# Altium PCB pcb.PcbDoc
Units mm, origin at the board's own origin, x right, y up, seen from the top; angles counter-clockwise.
Board outline 53 x 48 mm, 2 copper layers (Top Layer, Bottom Layer); 15 components, 9 nets, 49 pads, 1 vias.
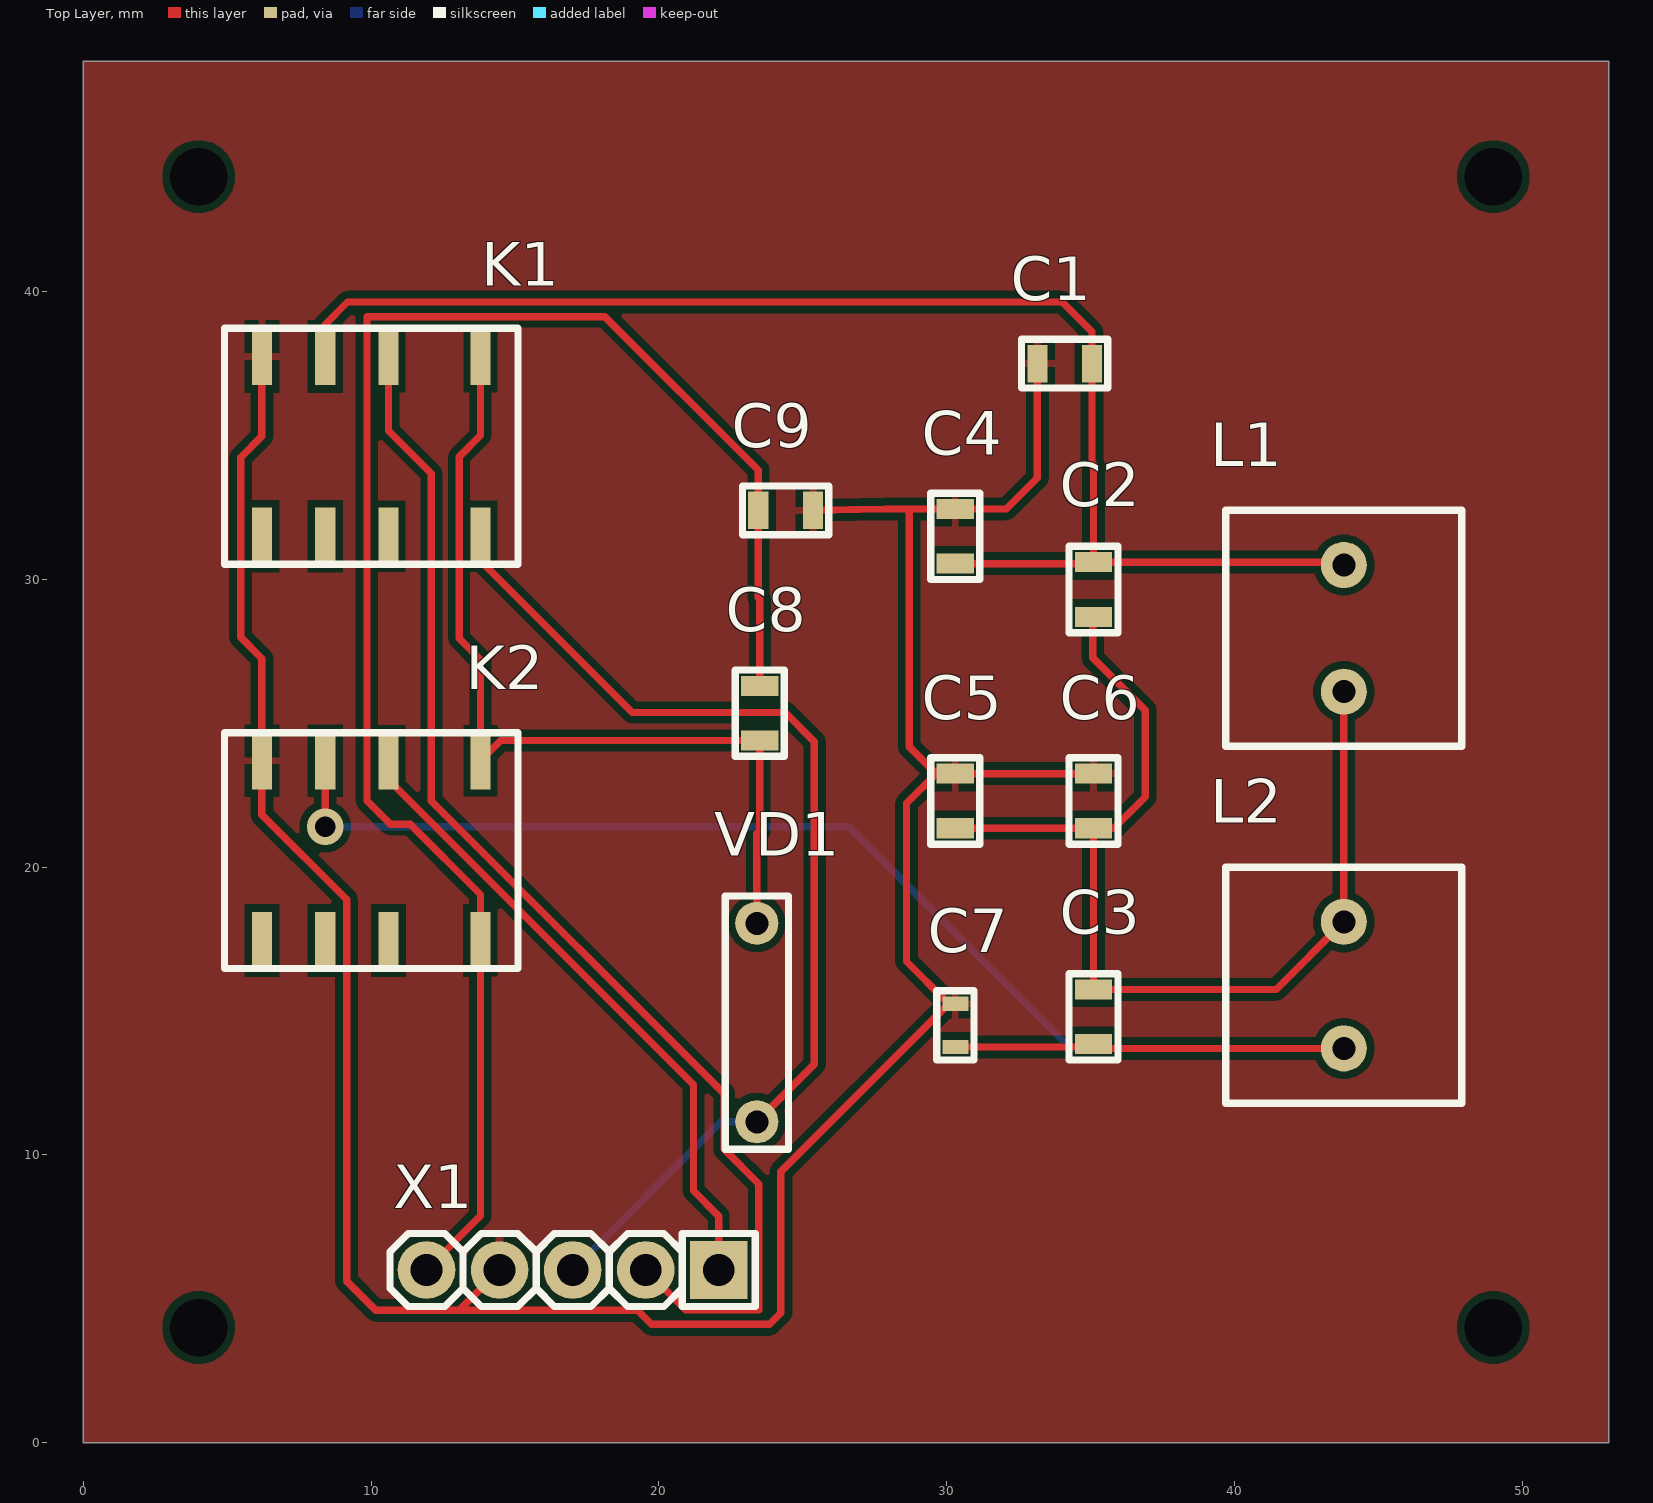
[diagram p0: Top Layer view]
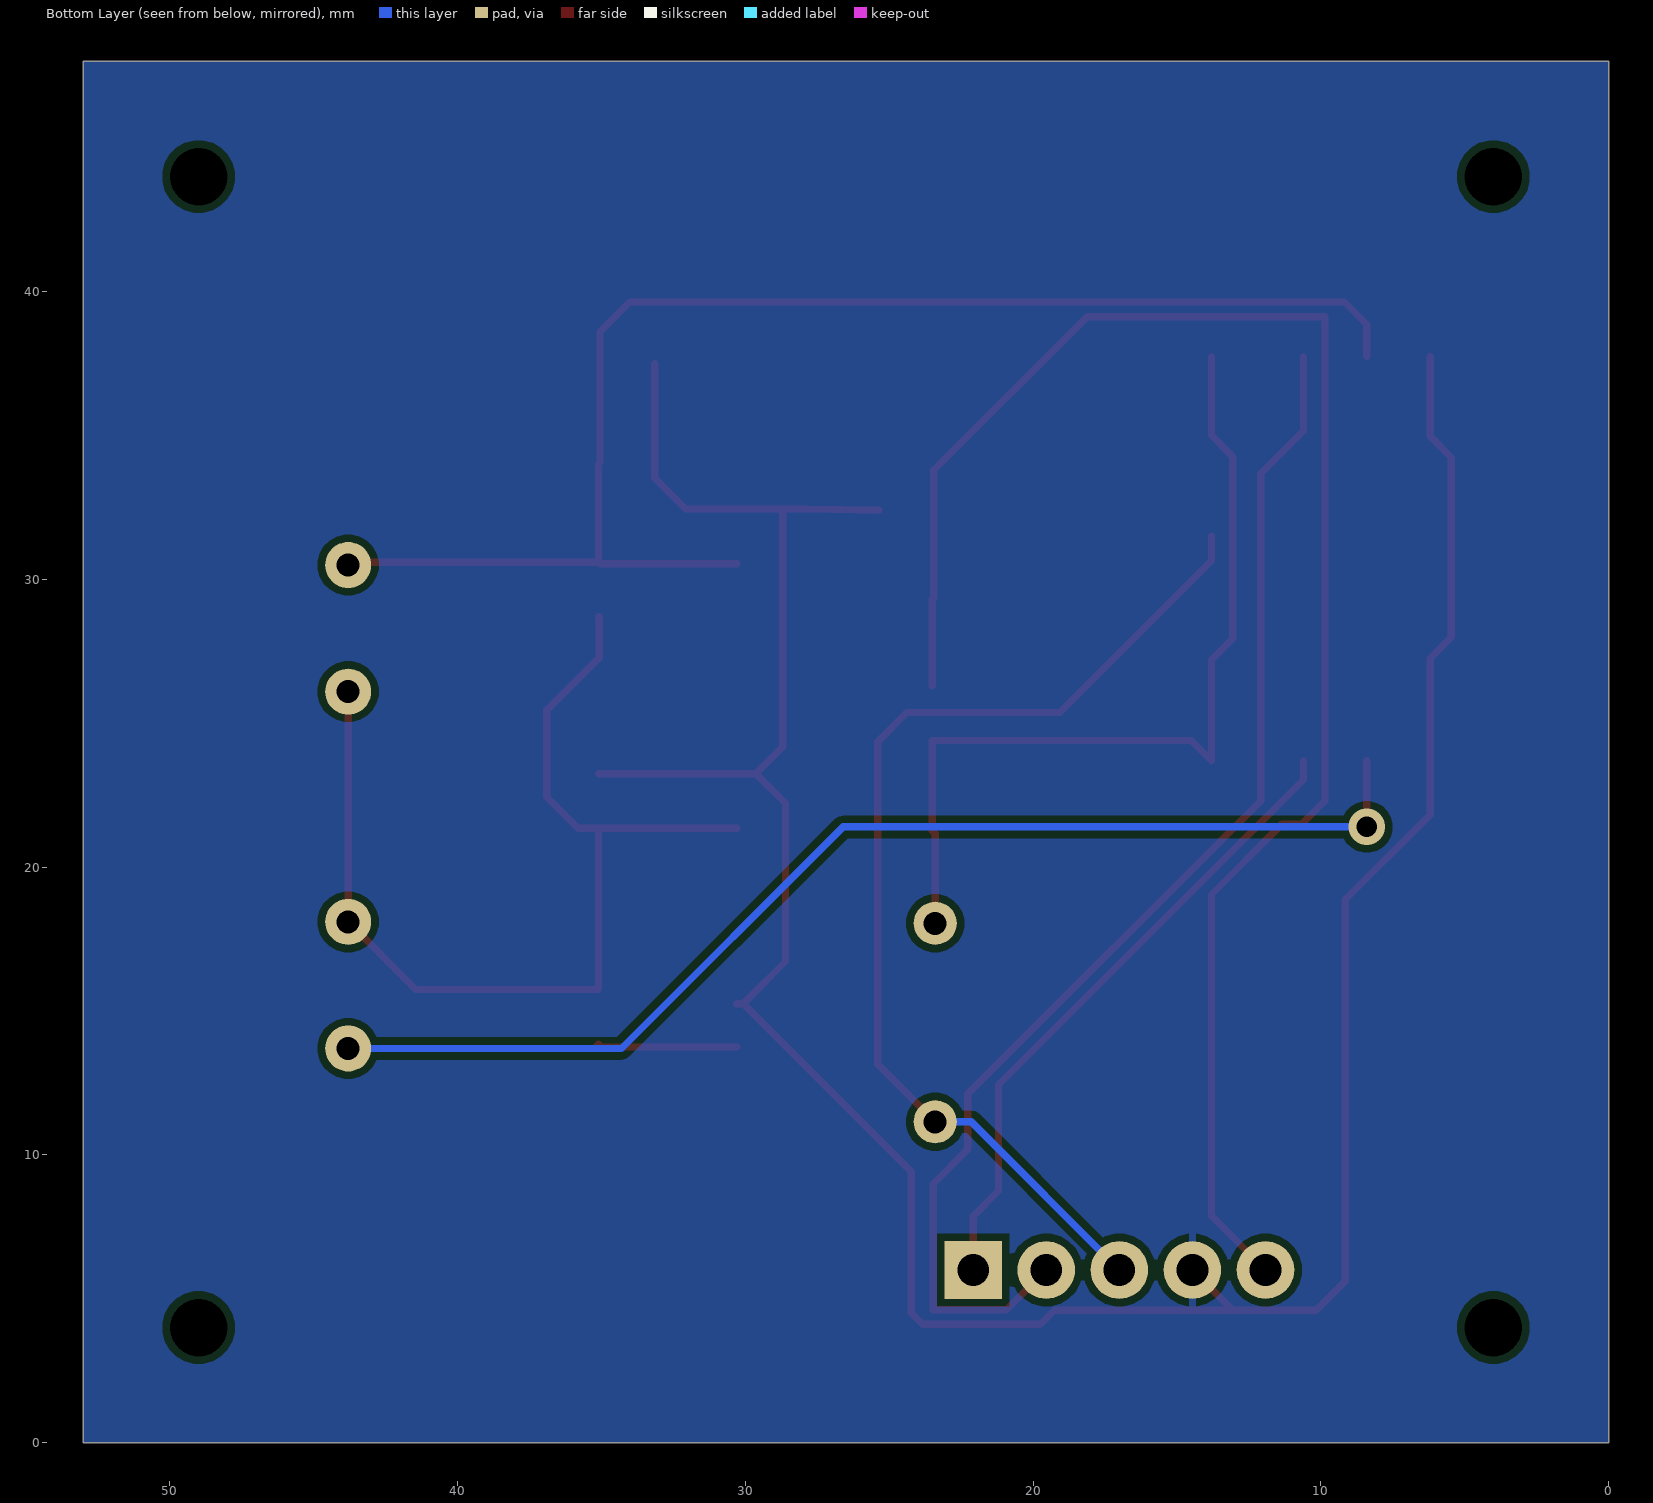
[diagram p1: Bottom Layer view, seen from below]
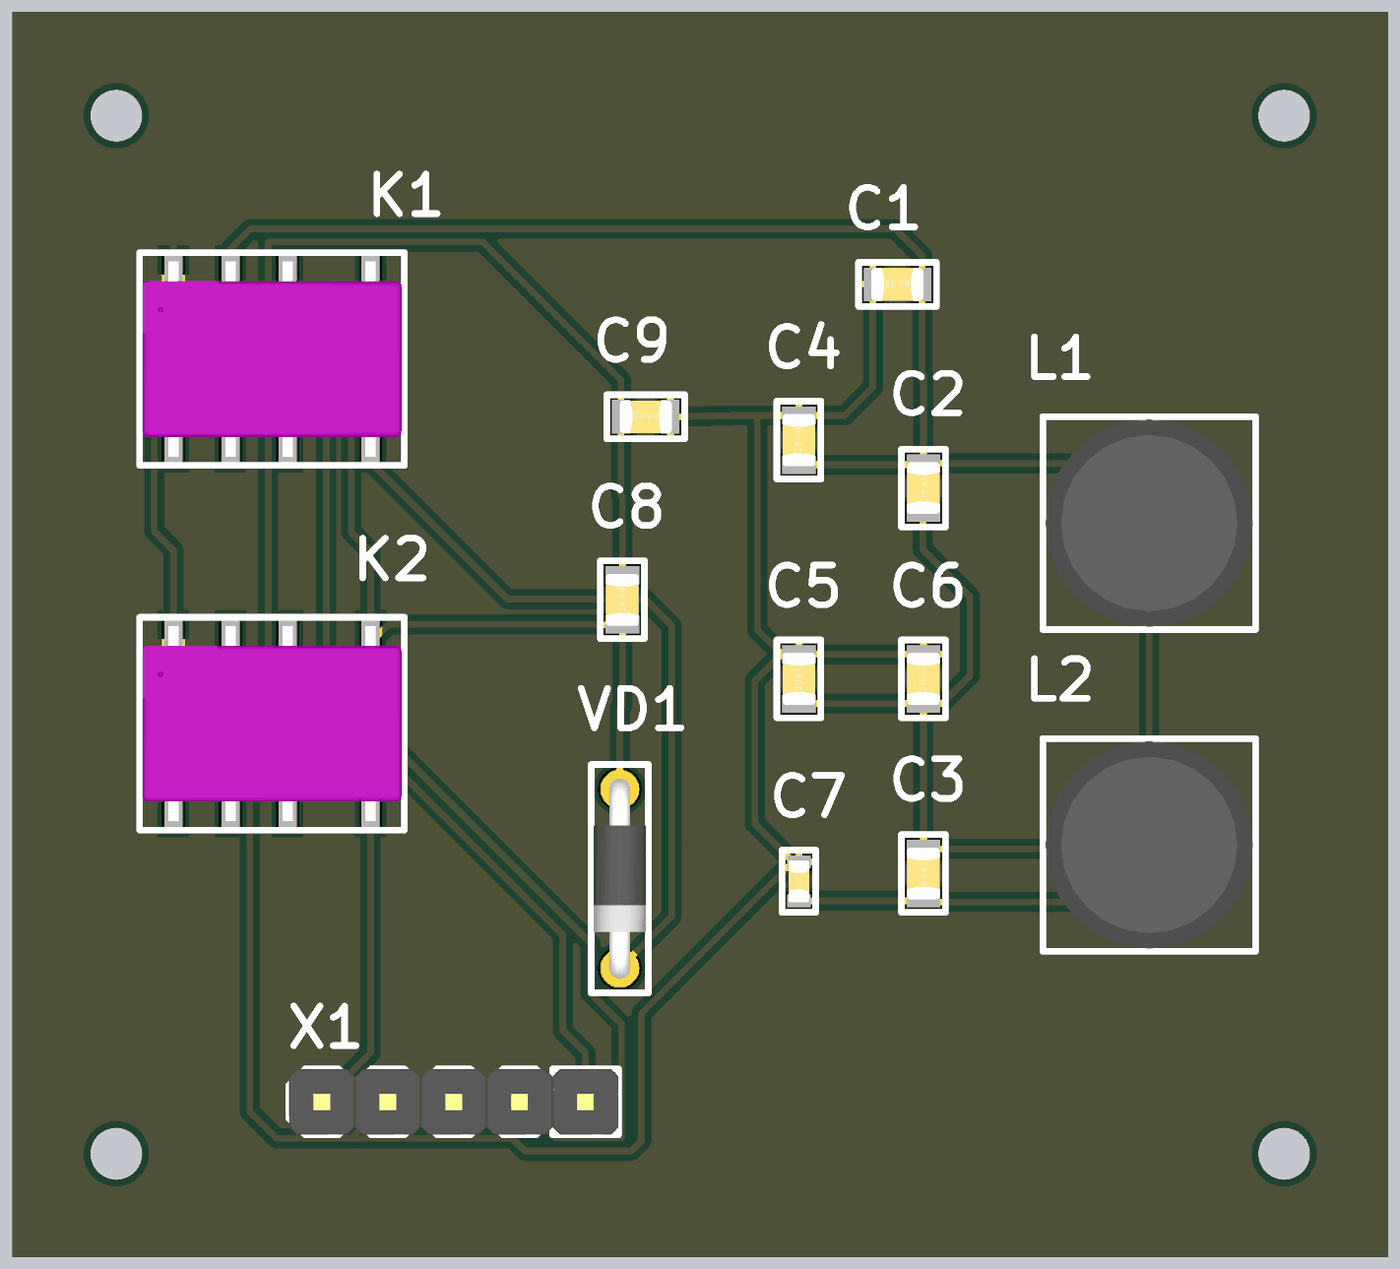
[diagram p2: 3D render of the assembled board from above, using the file's embedded part models]

## Layer stack, top to bottom
Top Solder: solder mask 0.0102, Solder Resist, Dk 3.5
Top Layer: signal copper 0.0356
Dielectric 1: dielectric 0.32, FR-4, Dk 4.8
Bottom Layer: signal copper 0.0356
Bottom Solder: solder mask 0.0102, Solder Resist, Dk 3.5

## Board outline
0,0 0,48 53,48 53,0

## Design rules (kind name [scope] priority, off if disabled: settings)
Clearance [All] p1: gap=0.254 ignorepadtopadclearanceinfootprint=FALSE except(0: Arc-Hole Track-Hole SMDPad-Hole THPad-Hole Via-Hole Fill-Hole Poly-Hole Region-Hole Text-Hole)
PolygonConnect [All] p1: connectstyle=Relief reliefconductorwidth=0.254 reliefentries=4 polygonreliefangle="90 Angle" airgapwidth=0.254
RoutingVias [All] p1: holewidth=0.711 width=1.27 viastyle="Through Hole" minholewidth=0.711 minwidth=1.27 maxholewidth=0.711 maxwidth=1.27
SolderMaskExpansion [All] p1: expansion=0.102 istentingtop=FALSE
Width [All] p1: maxlimit=0.254 minlimit=0.254 preferedwidth=0.254
30 further rules are at their usual default settings.

## Components (designator, comment, footprint, x,y, rotation, side; value= is the part's Value field where it differs from the comment)
C1 "10пФ-5%-50В-0805" capacitor_0805 34.1,37.5 r0 top
C2 "470пФ-5%-50В-0805" capacitor_0805 35.1,29.65 r270 top
C3 "160пФ-5%-50В-0805" capacitor_0805 35.1,14.8 r270 top
C4 "1000пФ-5%-50В-0805" capacitor_0805 30.3,31.5 r90 top
C5 "2200пФ-5%-50В-0805" capacitor_0805 30.3,22.3 r90 top
C6 "110пФ-5%-50В-0805" capacitor_0805 35.1,22.3 r90 top
C7 "850пФ-5%-50В-0603" capacitor_0603 30.3,14.5 r270 top
C8 "0.1мкФ-10%-50В-0805" capacitor_0805 23.5,25.35 r90 top
C9 "0.1мкФ-10%-50В-0805" capacitor_0805 24.4,32.4 r0 top
K1 "1-1462037-4 (IM03GR)" RELAY_IM03GR 10,34.625 r180 top
K2 "1-1462037-4 (IM03GR)" RELAY_IM03GR 10,20.575 r180 top
L1 "3.72мГн-0.3А-6x8" inductor_0810 43.8,28.3 r270 top
L2 "4.61мГн-0.3А-6x8" inductor_0810 43.8,15.9 r270 top
VD1 "1N4007" DIODE_DO41 23.4,14.6 r270 top
X1 "DS1021-1*5SF11-B" connector_5_pls 17,6 r180 top

## Footprints (in the part's own frame and the unit in brackets; to place one, negate y for a bottom-side part, rotate by r counter-clockwise, add the part's x,y. Pads: shape width x height; smd on the part's side, far side on the other; paste and mask are expansions set on the pad)
capacitor_0603 [mm]
  rect 0.5x0.9 smd: 0(-0.75,0) 1(0.75,0)
  silkscreen extent -1.2,-0.65 1.2,0.65, body extent -0.8,-0.4 0.8,0.4, height 0.9
capacitor_0805 [mm]
  rect 0.7x1.3 smd: 0(-0.95,0) 1(0.95,0)
  silkscreen extent -1.5,-0.85 1.5,0.85, body extent -1,-0.63 1,0.63, height 1.3
connector_5_pls [mm]
  rect 2x2 hole 1.1: 1(-5.08,0)
  round 2 hole 1.1: 2(-2.54,0) 3(0,0) 4(2.54,0) 5(5.08,0)
  silkscreen extent -6.35,-1.27 6.35,1.27, body extent -6.35,-1.27 6.35,1.27, height 8.54
DIODE_DO41 [mm]
  round 1.5 hole 0.8: 0(-3.45,0) 1(3.45,0)
  silkscreen extent -4.4,-1.1 4.4,1.1, body extent -3.85,-1 3.85,1, height 14
inductor_0810 [mm]
  round 1.6 hole 0.8: 0(-2.2,0) 1(2.2,0)
  silkscreen extent -4.1,-4.1 4.1,4.1, body extent -4,-4 4,4, height 24
RELAY_IM03GR [mm]
  rect 0.7x2 smd: 1(-3.8,-3.125) 2(-0.6,-3.125) 3(1.6,-3.125) 4(3.8,-3.125) 5(3.8,3.125) 6(1.6,3.125) 7(-0.6,3.125) 8(-3.8,3.125)
  silkscreen extent -5.1,-4.1 5.1,4.1, body extent -5,-3.76 5,3.76, height 5.65

## Part data
C1: library part Capacitor, Manufacturer="Murata Electronics", PartNumber=GRM2165C1H100JZ01D, Href=https://www.chipdip.ru/product/grm2165c1h100j, Kind=Capacitor
C2: library part Capacitor, Manufacturer="Murata Electronics", PartNumber=GRM2165C1H471JA01D, Href=https://www.chipdip.ru/product/grm2165c1h471j, Kind=Capacitor
C3: library part Capacitor, Manufacturer=Тайвань, PartNumber=MLCC160pFNPO50V5%0805, Href=https://www.chipdip.ru/product0/690402999, Kind=Capacitor
C4: library part Capacitor, Manufacturer="Murata Electronics", PartNumber=GRM2165C1H102JA01D, Href=https://www.chipdip.ru/product/grm2165c1h102j, Kind=Capacitor
C5: library part Capacitor, Manufacturer="Murata Electronics", PartNumber=GRM2165C1H222JA01D, Href=https://www.chipdip.ru/product/grm2165c1h222j, Kind=Capacitor
C6: library part Capacitor, Manufacturer=Тайвань, PartNumber=MLCC110pFNPO50V5%0805, Href=https://www.chipdip.ru/product0/636411021, Kind=Capacitor
C7: library part Capacitor, Manufacturer="Knowles Novacap", PartNumber=C06BL851X-1SN-X0T, Href=https://www.chipdip.ru/product0/8007540631, Kind=Capacitor
C8 C9: library part Capacitor, Manufacturer="Murata Electronics", PartNumber=GRM21BR71H104KA01L, Href=https://www.chipdip.ru/product/grm21br71h104k, Kind=Capacitor
K1 K2: library part Realy_IM03GR, Href=https://www.chipdip.ru/product/1-1462037-4-im03gr, Kind=Relay, Manufacturer="1-1462037-4 (IM03GR)", PartNumber="1-1462037-4 (IM03GR)"
L1 L2: library part Inductor, Manufacturer=FGHGF, PartNumber=0810, Href=https://aliexpress.ru/item/1005005459804767.html?sku_id=12000033167843835&spm=a2g2w.productlist.search_results.6.1bc373f3ryn7OB, Kind=Inductor
VD1: library part Diode, Manufacturer="Diotec Semiconductor", Href=https://www.chipdip.ru/product/1n4007, Kind=Diode, PartNumber=1N4007
X1: library part Connector_5, Manufacturer="Connfly electronic (Zhenqin)", Href=https://www.chipdip.ru/product/pls-5, Kind=Connector, PartNumber=DS1021-1*5SF11-B

## Free pads (board coordinates)
  round 0 hole 2 unplated: 17(4,4) 17(4,44) 17(49,4) 17(49,44)

## Via types
v1: diameter 1.27, hole 0.711, Top Layer to Bottom Layer, 1 vias

## Nets (pads, with @x,y where several pads share a name; then routed paths per layer and width w, separated by ;. In a path a pad name is that pad's centre, name@x,y a point inside that pad or via, vN(x,y) a via of type N, cw(c..) or ccw(c..) an arc to the next point about the centre after c; other vN are vias at no path point)
GND: C1.0 C4.1 C5.1 C6.1 C7.0 C9.1 K1.4 K2.4 X1.4 | length 101.5
  Top Layer w0.254: K1.4 6.2,34.976 5.461,34.237 5.461,27.991 6.2,27.252 K2.4 6.2,21.819 9.144,18.875 9.144,5.613 10.16,4.597 13.057,4.597 ; X1.4 13.057,4.597 ; C9.1 27.838,32.45 28.7,32.45 ; C7.0 C7.0@30.074,15.25 ; C1.0 33.15,33.528 32.072,32.45 C4.1 28.7,32.45 ; C6.1 C5.1 29.633,23.25 ; 13.057,4.597 19.252,4.597 19.738,4.111 23.845,4.111 24.236,4.503 24.236,9.413 C7.0@30.074,15.25 ; 28.7,32.45 28.7,24.183 29.633,23.25 ; 29.633,23.25 28.6,22.217 28.6,20.447 28.6,16.724 29.951,15.373 29.977,15.373 30.074,15.276 C7.0@30.074,15.25
NetC1_1: C1.1 C2.0 C4.0 K1.3 L1.0 | length 50.1
  Top Layer w0.254: K1.3 8.4,38.862 9.177,39.639 34.019,39.639 35.05,38.608 C1.1 35.05,34.061 35.1,34.011 C2.0 ; C4.0 35.05,30.55 C2.0 ; L1.0 43.7,30.6 C2.0
NetC2_1: C2.1 C3.0 C5.0 C6.0 L1.1 L2.0 | length 37.4
  Top Layer w0.254: C5.0 C6.0 ; C2.1 35.077,28.7 35.077,27.28 36.9,25.457 36.9,22.436 35.814,21.35 C6.0 ; L1.1 L2.0 41.45,15.75 C3.0 C6.0
NetC3_1: C3.1 C7.1 K2.3 L2.1 | length 54.5
  Top Layer w0.254: v1(8.4,21.4) K2.3 ; C7.1 35,13.75 C3.1 35.25,13.7 L2.1
  Bottom Layer w0.254: v1(8.4,21.4) 26.6,21.4 34.3,13.7 L2.1
NetC8_0: C8.0 K1.1 K2.1 VD1.0 | length 31
  Top Layer w0.254: K1.1 13.8,35.009 13.056,34.265 13.056,27.948 13.8,27.203 K2.1 14.5,24.4 C8.0 23.5,21.258 23.4,21.158 VD1.0
NetC8_1: C8.1 C9.0 K2.8 X1.5 | length 59.3
  Top Layer w0.254: X1.5 13.8,7.88 K2.8 13.8,19.05 11.354,21.496 10.668,21.496 9.855,22.309 9.855,39.131 18.121,39.131 23.45,33.802 C9.0 23.45,29.362 23.5,29.312 C8.1
NetK1_2: K1.2 X1.2 | length 43
  Top Layer w0.254: K1.2 10.6,35.171 12.09,33.68 12.09,22.301 22.269,12.123 22.269,10.192 23.47,8.992 23.47,4.619 20.921,4.619 X1.2
NetK1_8: K1.8 VD1.1 X1.3 | length 37.6
  Top Layer w0.254: K1.8 13.8,30.65 19.075,25.375 24.384,25.375 25.4,24.359 25.4,13.15 VD1.1
  Bottom Layer w0.254: X1.3 22.15,11.15 VD1.1
NetK2_2: K2.2 X1.1 | length 22.5
  Top Layer w0.254: K2.2 10.6,23.038 21.2,12.438 21.2,8.749 22.08,7.869 X1.1
pads on no net: K1.5 K1.6 K1.7 K2.5 K2.6 K2.7

## Polygon pours and split planes (outlines as drawn)
GND on Top Layer "GND_L01_P000" (solid, pour order 0): 0,48 53,48 53,0 0,0
GND on Bottom Layer "GND_L02_P001" (solid, pour order 1): 0,48 53,48 53,0 0,0